# Altium PCB PCB1.PcbDoc
Units mil, origin at the board's own origin, x right, y up, seen from the top; angles counter-clockwise.
Board outline 2275 x 2745 mil, 2 copper layers (Top Layer, Bottom Layer); 38 components, 25 nets, 135 pads, 21 vias.
Unrouted connection lines stored in the file: 29.
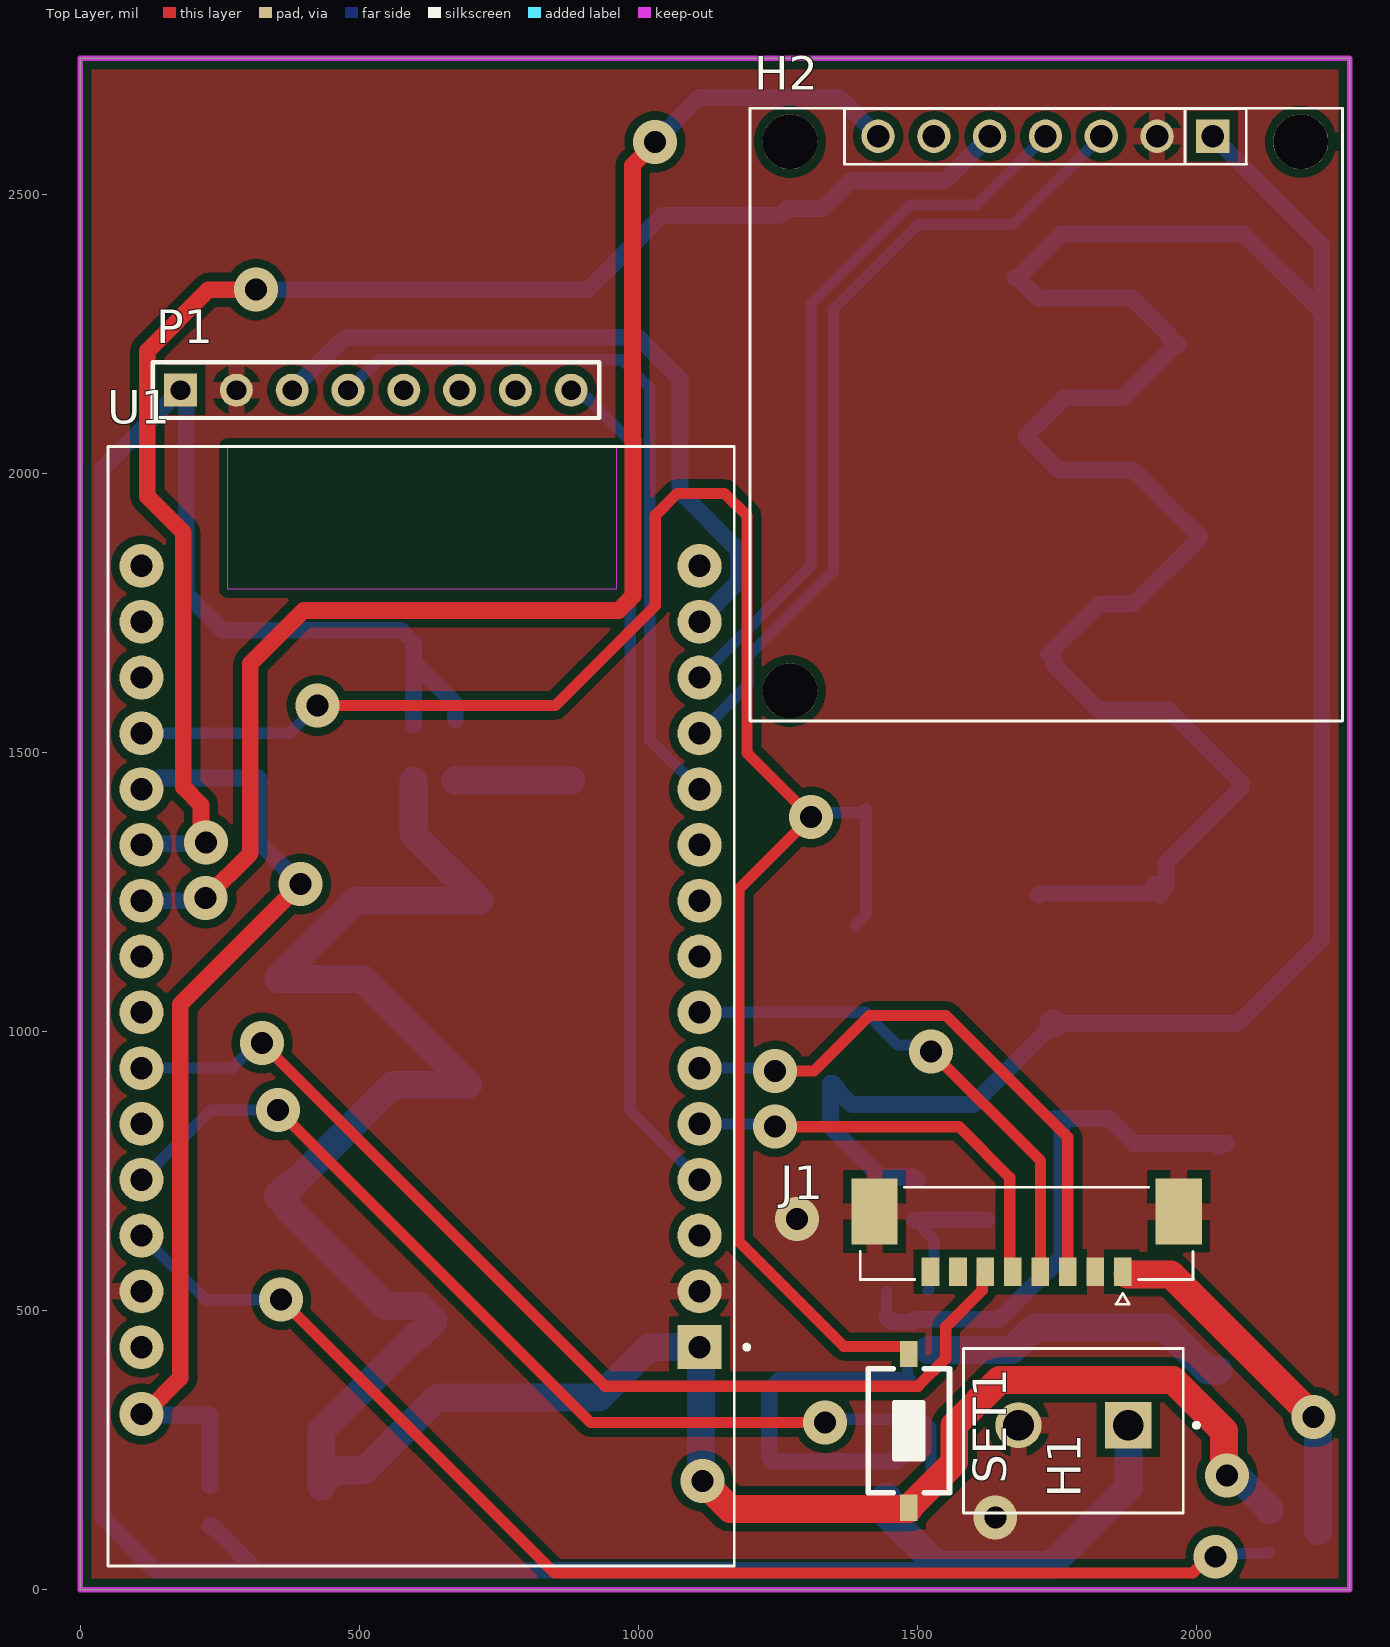
[diagram p0: Top Layer view]
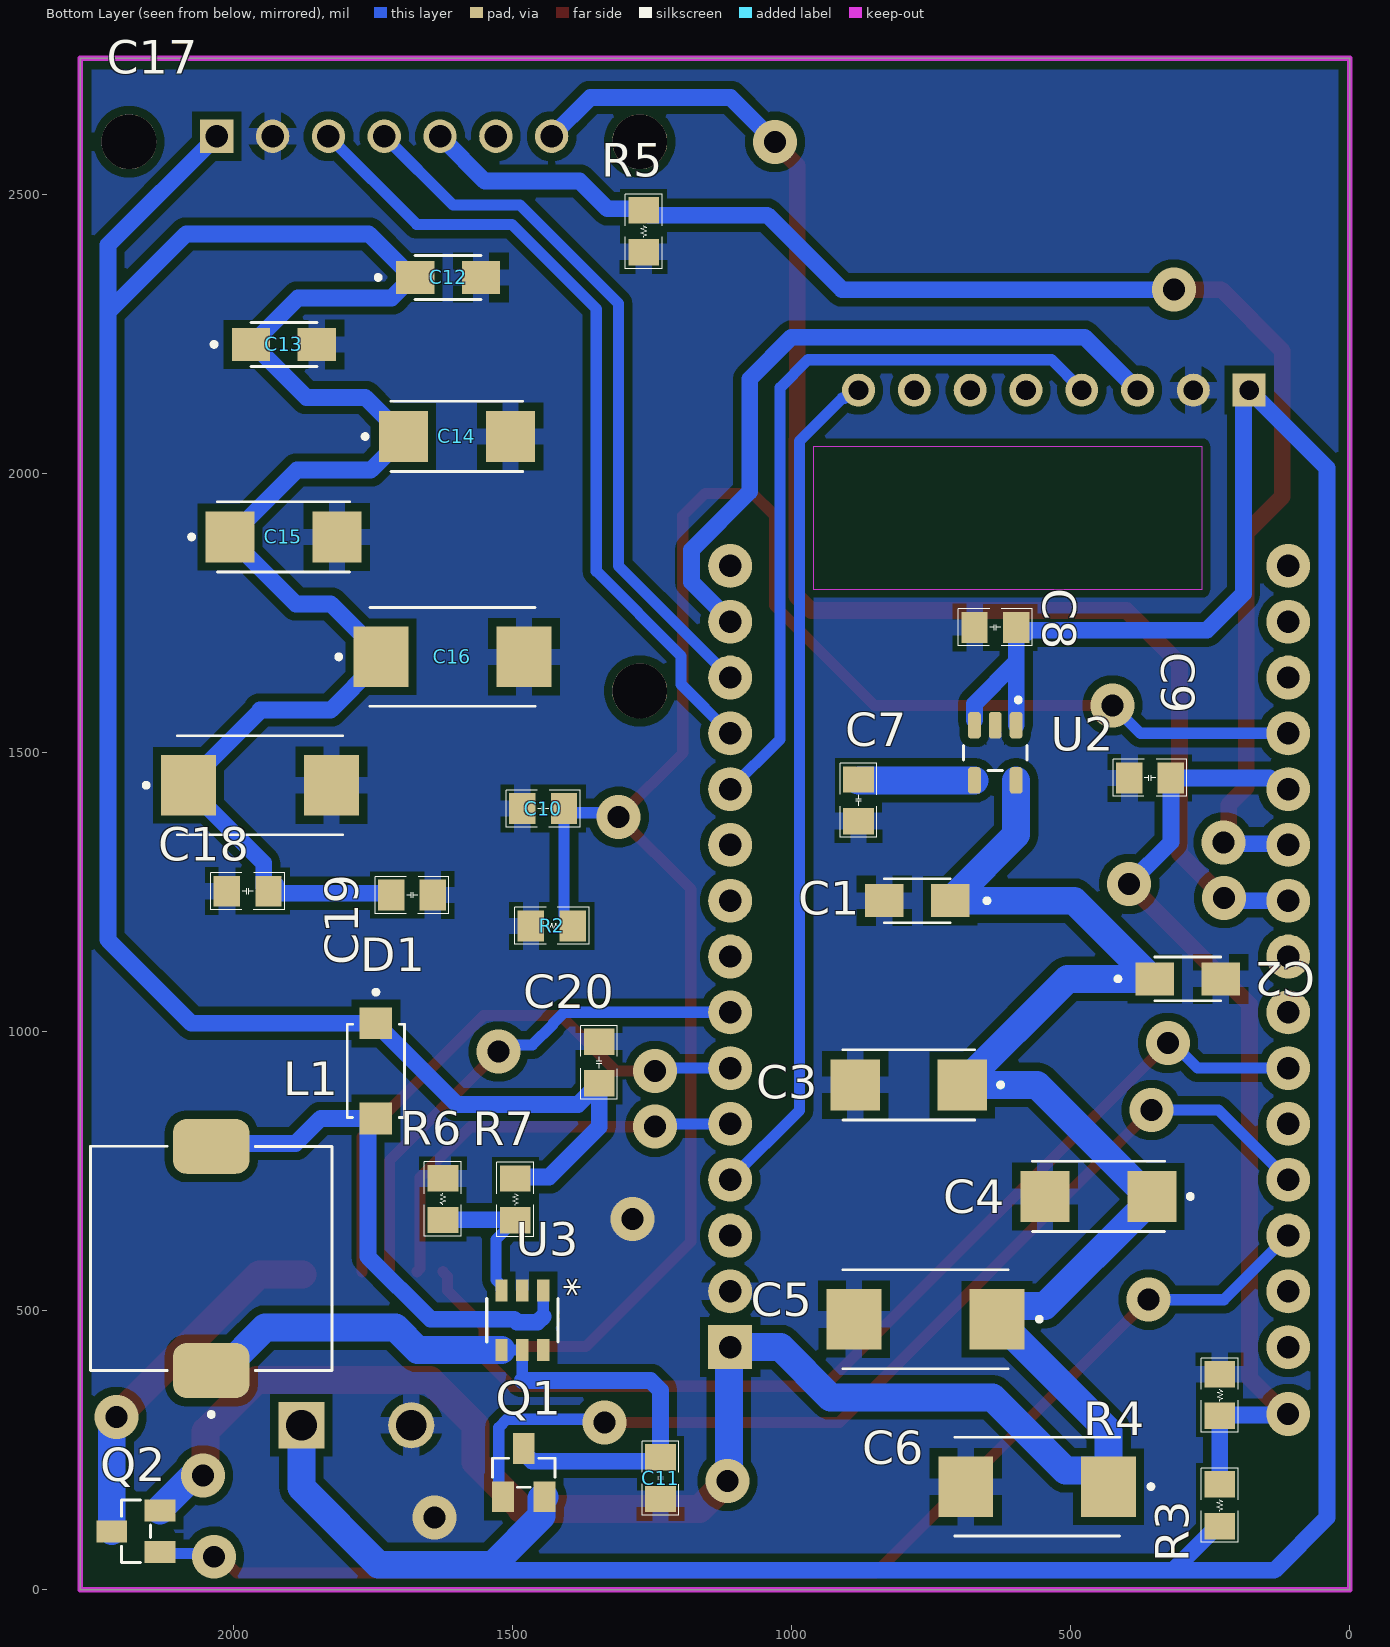
[diagram p1: Bottom Layer view, seen from below]
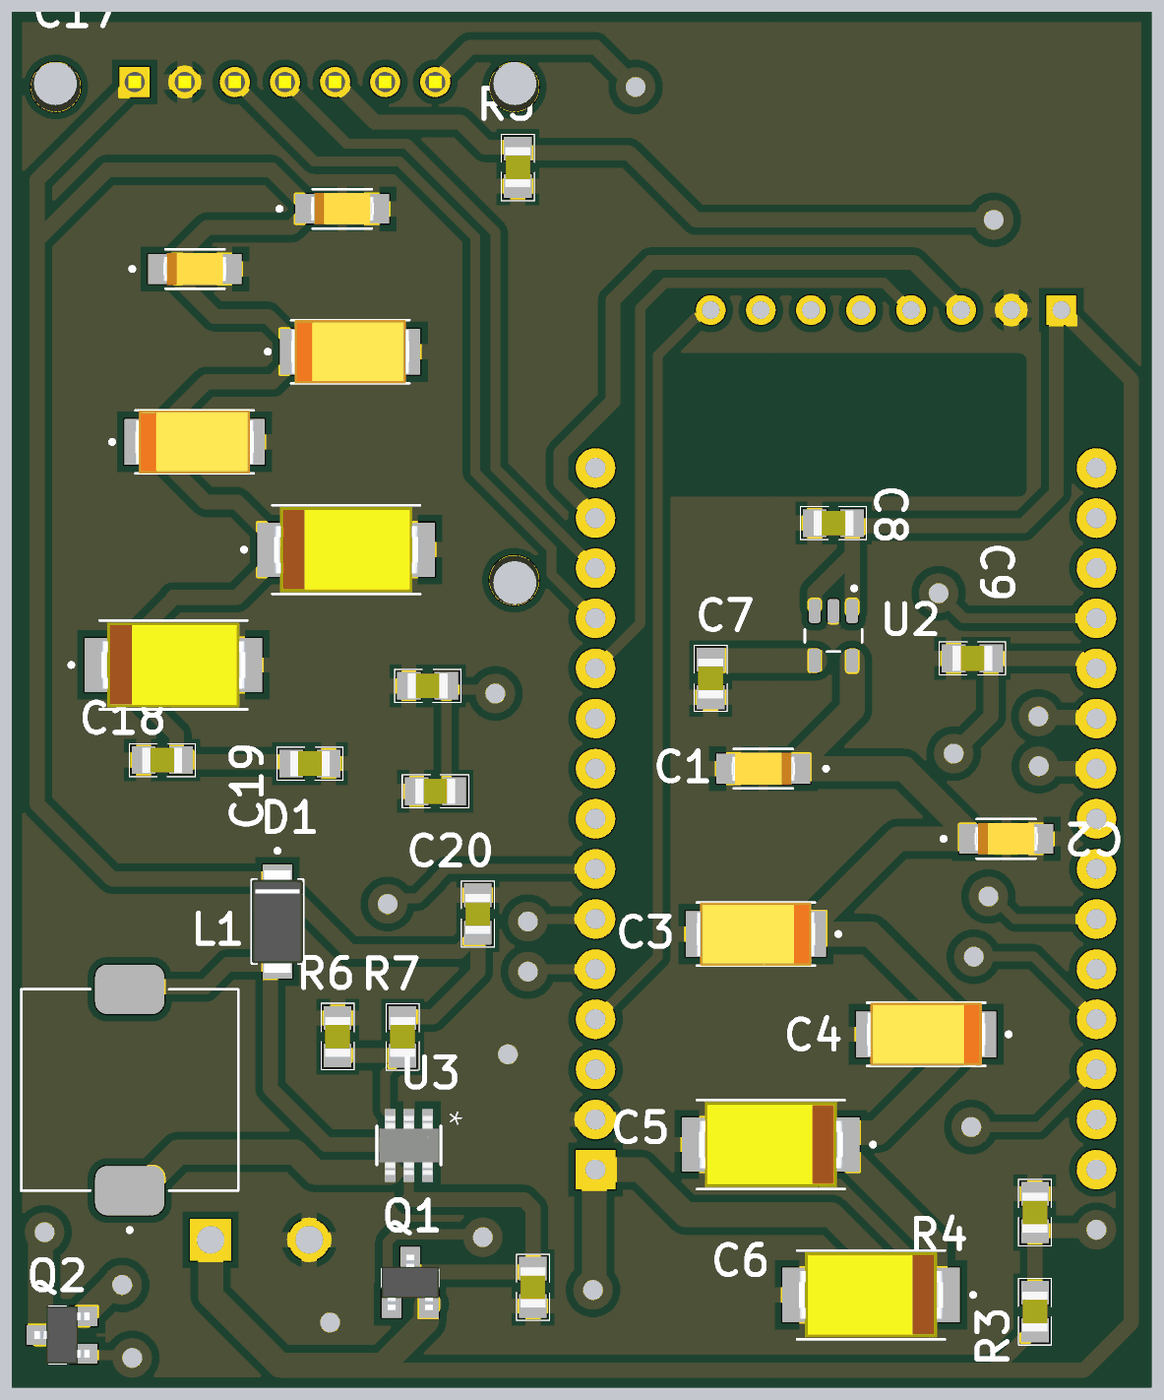
[diagram p2: 3D render of the assembled board from below, using the file's embedded part models]

## Layer stack, top to bottom
Top Solder: solder mask 0.4, Solder Resist, Dk 3.5
Top Layer: signal copper 1.4
Dielectric 1: dielectric 12.6, FR-4, Dk 4.8
Bottom Layer: signal copper 1.4
Bottom Solder: solder mask 0.4, Solder Resist, Dk 3.5

## Board outline
2275,0 1325,0 0,0 0,2745 2275,2745

## Design rules (kind name [scope] priority, off if disabled: settings)
BoardOutlineClearance [All] p1: gap=7.87 ignorepadtopadclearanceinfootprint=FALSE
Clearance [All] p1: gap=15 ignorepadtopadclearanceinfootprint=FALSE except(9.84: Arc-Hole Track-Hole SMDPad-Hole THPad-Hole Via-Hole Fill-Hole Poly-Hole Region-Hole Text-Hole)
ComponentClearance [All] p1: gap=5 collisioncheckmode=3 verticalgap=5 showdistances=TRUE
DiffPairsRouting [All] p1: maxlimit=10 minlimit=5 mostfreqgap=5 toplayer_minwidth=5 toplayer_maxwidth=1000 toplayer_prefwidth=5 bottomlayer_minwidth=5 bottomlayer_maxwidth=1000 bottomlayer_prefwidth=5 maxuncoupledlength=500
Height [All] p1: minheight=0 maxheight=71497.94 prefheight=500
HoleSize [All] p1: absolutevalues=TRUE maxlimit=248.03 minlimit=11.81 maxpercent=80.000 minpercent=20.000
HoleToHoleClearance [All] p1: gap=9.84 allowstackedmicrovias=FALSE
MinimumAnnularRing [All] p1: minimumring=3
MinimumSolderMaskSliver [All] p1: minsoldermaskwidth=0
PlaneClearance [All] p1: clearance=5
PlaneConnect PlaneConnectPowerPads [InPadClass('PowerPads')] p1: planeconnectstyle=Relief reliefexpansion=20 reliefentries=4 reliefconductorwidth=10 reliefairgap=10
PlaneConnect [All] p2: planeconnectstyle=Relief reliefexpansion=11.81 reliefentries=4 reliefconductorwidth=15 reliefairgap=5
PolygonConnect PolygonConnectPowerPads [All vs (InPadClass('PowerPads'))] p1: thpad.connectstyle=Direct thpad.reliefconductorwidth=10 thpad.reliefentries=4 thpad.polygonreliefangle="90 Angle" thpad.airgapwidth=10 smdpad.connectstyle=Direct smdpad.reliefconductorwidth=10 smdpad.reliefentries=4 smdpad.polygonreliefangle="90 Angle" smdpad.airgapwidth=10 via.connectstyle=Relief via.reliefconductorwidth=10 via.reliefentries=4 via.polygonreliefangle="90 Angle" via.airgapwidth=10
PolygonConnect [All] p2: thpad.connectstyle=Relief thpad.reliefconductorwidth=30 thpad.reliefentries=4 thpad.polygonreliefangle="90 Angle" thpad.airgapwidth=15 smdpad.connectstyle=Relief smdpad.reliefconductorwidth=30 smdpad.reliefentries=4 smdpad.polygonreliefangle="90 Angle" smdpad.airgapwidth=15 via.connectstyle=Direct via.reliefconductorwidth=30 via.reliefentries=4 via.polygonreliefangle="90 Angle" via.airgapwidth=15
RoutingVias [All] p1: holewidth=39.37 width=78.74 viastyle="Through Hole" minholewidth=39.37 minwidth=78.74 maxholewidth=39.37 maxwidth=78.74
SilkToSilkClearance [All] p1: silktosilkclearance=0
SilkToSolderMaskClearance [IsPad] p1: minsilkscreentomaskgap=1 clearancetoexposedcopper=TRUE
SolderMaskExpansion SolderMaskExpansion_Via [IsVia] p1: expansion=4 istentingtop=TRUE
SolderMaskExpansion [All] p2: expansion=2.95 istentingtop=FALSE
Width [All] p1: maxlimit=50 minlimit=20 preferedwidth=30
20 further rules are at their usual default settings.

## Components (designator, comment, footprint, x,y, rotation, side; value= is the part's Value field where it differs from the comment)
C1 "OPT" 1206_Tantalum 775,1235 r0 bottom
C2 "OPT" 1206_Tantalum 290,1095 r180 bottom
C3 "OPT" 2312_Tantalum 790,905 r0 bottom
C4 "OPT" 2312_Tantalum 450,705 r0 bottom
C5 "100uF" "2917 _Tantalum" 760,485 r0 bottom
C6 "100uF" "2917 _Tantalum" 560,185 r0 bottom
C7 "22uF" 0805_Cap 880,1415 r270 bottom
C8 "10uF" 0805_Cap 635,1725 r180 bottom
C9 "100nF" 0805_Cap 357.77,1455.13 r180 bottom
C10 "10uF" 0805_Cap 1445,1400 r0 bottom
C11 "22uF" 0805_Cap 1235,200 r90 bottom
C12 "OPT" 1206_Tantalum 1615.68,2351.95 r180 bottom
C13 "OPT" 1206_Tantalum 1909.74,2231.95 r180 bottom
C14 "OPT" 2312_Tantalum 1599.74,2066.95 r180 bottom
C15 "OPT" 2312_Tantalum 1910.61,1886.95 r180 bottom
C16 "100uF" "2917 _Tantalum" 1607.69,1671.95 r180 bottom
C17 "100uF" "2917 _Tantalum" 1952.69,1441.95 r180 bottom
C18 "100nF" 0805_Cap 1974.74,1251.95 r0 bottom
C19 "10uF" 0805_Cap 1680,1245 r0 bottom
C20 "22uF" 0805_Cap 1345,945 r90 bottom
D1 "SS34" SODFL5226X100N 1745,930 r270 bottom
H1 "KF301-2P" HANDSON_KF301-2P 1780,295 r180 top
H2 "A7680C" "Module A7680C" 2030,2605 r180 top
J1 "533980871" MOLEX_533980871 1696.18,638.9 r0 top
L1 "22uH" "INDUCTOR CDRH104" 2040,590 r90 bottom
P1 "MPU6050" HDR1X8 180,2150 r0 top
Q1 "S8550" SOT23 1480,210 r180 bottom
Q2 "S8550" SOT23 2175,105 r90 bottom
R2 "10K" 0805_Res 1430,1190 r180 bottom
R3 "8.2K" 0805_Res 232.72,151.88 r270 bottom
R4 "33K" 0805_Res 232.59,349.46 r270 bottom
R5 "10K" 0805_Res 1265,2435 r270 bottom
R6 "300" 0805_Res 1625,700 r90 bottom
R7 "2.2K" 0805_Res 1495,700 r270 bottom
SET1 "Button 2p" "Button 2p 3x6x2.5" 1485,285 r270 top
U1 "ESP32-DEVKIT-V1" MODULE_ESP32_DEVKIT_V1 610,1045.83 r180 top
U2 "SPX3819" SOT95P280X145-5N 635,1500 r270 bottom
U3 "MT3608" TSOT23-6SOT23-6_AER 1482.6,483.25 r270 bottom

## Footprints (in the part's own frame and the unit in brackets; to place one, negate y for a bottom-side part, rotate by r counter-clockwise, add the part's x,y. Pads: shape width x height; smd on the part's side, far side on the other; paste and mask are expansions set on the pad)
0805_Cap [mm]
  rect 1.2x1.4 smd: 1(-0.946,-0.003) 2(0.954,-0.003)
  silkscreen extent -1.68,-0.84 1.68,0.84, body extent -1.01,-0.64 1.01,0.63, height 0.61
0805_Res [mm]
  rect 1.2x1.4 smd: 1(-0.946,-0.003) 2(0.954,-0.003)
  silkscreen extent -1.68,-0.84 1.7,0.84, body extent -1.01,-0.64 1.01,0.63, height 0.61
1206_Tantalum [mm]
  rect 1.75x1.5 smd: 1(-1.5,0) 2(1.5,0)
  silkscreen extent -3.28,-1 1.5,1, body extent -1.6,-0.8 1.6,0.8, height 1.8
2312_Tantalum [mm]
  rect 2.24x2.32 smd: 1(-2.435,0) 2(2.435,0)
  silkscreen extent -4.28,-1.6 3,1.6, body extent -3,-1.6 3,1.6, height 2.8
"2917 _Tantalum" [mm]
  rect 2.5x2.75 smd: 1(-3.25,0) 2(3.25,0)
  silkscreen extent -5.28,-2.25 3.75,2.25, body extent -3.65,-2.15 3.65,2.15, height 3.1
"Button 2p 3x6x2.5" [mm]
  rect 1.2x0.8 smd: 1(-3.5,0) 2(3.5,0)
  silkscreen extent -2.82,-1.85 2.82,1.85, body extent -3.05,-1.85 3.05,1.85, height 2.5
HANDSON_KF301-2P [mm]
  rect 2.1x2.1 hole 1.4: 1(-2.5,0)
  round 2.1 hole 1.4: 2(2.5,0)
  silkscreen extent -5.7,-3.5 5,4
HDR1X8 [mm] "Connector; Header; 8 Position"
  rect 1.5x1.5 hole 0.9: 1(0,0)
  round 1.5 hole 0.9: 2(2.54,0) 3(5.08,0) 4(7.62,0) 5(10.16,0) 6(12.7,0) 7(15.24,0) 8(17.78,0)
  silkscreen extent -1.27,-1.27 19.05,1.27
"INDUCTOR CDRH104" [mm] "CDRH104 Cu?n C?m Dan SMD 1038-220 22uH 3.6A"
  rrect50% 2.5x3.5 smd: 1(-5,0) 2(5.2,0)
  silkscreen extent -7.1,-5.5 5.21,5.5
"Module A7680C" [mm] "Footprint for A7680C"
  rect 1.52x1.52 hole 1.02: 1(0,0)
  round 1.52 hole 1.02: 2(2.54,0) 3(5.08,0) 4(7.62,0) 5(10.16,0) 6(12.7,0) 7(15.24,0)
  round 2.5 hole 2.5: 21(-4,0.25) 21(19.25,25.25) 21(19.25,0.25)
  silkscreen extent -5.9,-1.28 21.07,26.62, body extent -5.88,-1.28 21.12,26.72, height 12.01
MODULE_ESP32_DEVKIT_V1 [mm]
  rect 2x2 / inner round 2 / far side rect 2x2 hole 1.02: 1(-12.7,15.515)
  round 2 hole 1.02: 2(-12.7,12.975) 3(-12.7,10.435) 4(-12.7,7.895) 5(-12.7,5.355) 6(-12.7,2.815) 7(-12.7,0.275) 8(-12.7,-2.265) 9(-12.7,-4.805) 10(-12.7,-7.345) 11(-12.7,-9.885) 12(-12.7,-12.425) 13(-12.7,-14.965) 14(-12.7,-17.505) 15(-12.7,-20.045) 16(12.7,-20.045) 17(12.7,-17.505) 18(12.7,-14.965) 19(12.7,-12.425) 20(12.7,-9.885) 21(12.7,-7.345) 22(12.7,-4.805) 23(12.7,-2.265) 24(12.7,0.275) 25(12.7,2.815) 26(12.7,5.355) 27(12.7,7.895) 28(12.7,10.435) 29(12.7,12.975) 30(12.7,15.515)
  Keep-Out Layer region: 8.78,-25.475 -8.91,-25.475 -8.91,-18.985 8.78,-18.985
  Keep-Out Layer region: 8.78,-25.475 -8.91,-25.475 -8.91,-18.985 8.78,-18.985
  silkscreen extent -14.95,-25.48 14.23,25.48
MOLEX_533980871 [mm]
  rect 0.8x1.3 smd mask+0.076: 1(4.375,-1.75) 2(3.125,-1.75) 3(1.875,-1.75) 4(0.625,-1.75) 5(-0.625,-1.75) 6(-1.875,-1.75) 7(-3.125,-1.75) 8(-4.375,-1.75)
  rect 2.1x3 smd mask+0.076: S1(-6.925,1) S2(6.925,1)
  silkscreen extent -7.57,-3.23 7.57,2.1
SODFL5226X100N [mm]
  rect 1.44x1.48 smd: 1(-2.165,0) 2(2.165,0)
  silkscreen extent -3.68,-1.3 2.12,1.3, body extent -2.6,-1.3 2.6,1.3, height 1
SOT23 [mm]
  rect 1x1.4 smd: 1(-0.95,-1.1) 2(0.95,-1.1) 3(0,1.1)
  silkscreen extent -1.42,-0.66 1.42,0.66, body extent -1.45,-1.4 1.45,1.4, height 1.25
SOT95P280X145-5N [mm]
  rrect50% 1.21x0.59 smd: 1(-1.255,0.95) 2(-1.255,0) 3(-1.255,-0.95) 4(1.255,-0.95) 5(1.255,0.95)
  silkscreen extent -2.51,-1.45 0.8,1.45
TSOT23-6SOT23-6_AER [mil]
  rect 39.5x22 smd paste+0 mask+0: 1(-53.25,37.4) 2(-53.25,0) 3(-53.25,-37.4) 4(53.25,-37.4) 5(53.25,0) 6(53.25,37.4)
  silkscreen extent -39,-64 39,64, body extent -59,-59 59,59, height 57

## Part data
C1 C2 C3 C4 C5 C6 C12 C13 C14 C15 C16 C17: library part Tantalum, "Molded Tantalum Capacitors"
C7 C8: library part "Ceramic Capacitor_1", Chung_Loai=Dán, Don_Vi=Con, Ma_Hang=MH004551, So_Chan=2, Ten_Linh_Kien="Tụ 0805 104-100nF 10% 50V"
C9 C10 C11 C18 C19 C20: library part "Ceramic Capacitor", Chung_Loai=Dán, Don_Vi=Con, Ma_Hang=MH004551, So_Chan=2, Ten_Linh_Kien="Tụ 0805 104-100nF 10% 50V"
D1: library part SS34ALH, "3A, 40V, Schottky Rectifier", Package="DO-221AC Taiwan Semiconductor", Availability="Not in stock", Check_prices=https://www.snapeda.com/parts/SS34ALH/Taiwan+Semiconductor/view-part/?ref=eda, MF="Taiwan Semiconductor", MP=SS34ALH, Price=None, SnapEDA_Link=https://www.snapeda.com/parts/SS34ALH/Taiwan+Semiconductor/view-part/?ref=snap
H1: "2 Pin Terminal Block 5mm Pitch", Package=None, Availability=Unavailable, MP=KF301-2P, Price=None
H2: library part "Module A7680C", "SIM Module A7680C; A7672S 4G"
J1: "MX 1.25mm 8 pin;Conn; Rect; Header; 1.25 mm Pitch; PCB; 8 Cir; Ver; SMT; PicoBlade; LF", Package=None, Availability=Unavailable, MP=533980871, Price=None
L1: library part Inductor, "Inductors from EPCOS include SMT Inductors, SMT Power Inductors, Transponder Coils, ISDN Transformers, xDSL Transformers, DC/DC Converters, RF Transformers and SMT Current Sense Transformers.", Package="NON STANDARD-2 EPCOS", Availability="In Stock", Check_prices=https://www.snapeda.com/parts/B82477G4472M000/EPCOS/view-part/?ref=eda, MF=EPCOS, MP=B82477G4472M000, Price=None, Purchase-URL=https://pricing.snapeda.com/search/part/B82477G4472M000/?ref=eda, SnapEDA_Link=https://www.snapeda.com/parts/B82477G4472M000/EPCOS/view-part/?ref=snap
P1: library part "Header 8", "Module MPU6050", LatestRevisionDate=17-Jul-2002, LatestRevisionNote="Re-released for DXP Platform.", Publisher="Altium Limited"
Q1 Q2: "Bipolar (BJT) Transistor PNP SOT-23", Package=None, Availability="In Stock", Check_prices=https://banlinhkien.com/s8050-sot23-trans-npn-0.5a-40v-j3y-10c-p15943539.html, MF=UMW, MP=S8050, Price=None, Purchase-URL=https://banlinhkien.com/s8050-sot23-trans-npn-0.5a-40v-j3y-10c-p15943539.html, SnapEDA_Link=https://www.snapeda.com/parts/S8050/Umwelt+Sensor+Teknik/view-part/?ref=snap
R2 R3 R4 R5 R6 R7: library part Resistor, Chung_Loai=Dán, Don_Vi=Con, Ma_Hang=MH005468, So_Chan=2, Ten_Linh_Kien="Trở 0805 1% 1k"
SET1: "Nut Nhan 2 Chan SMD 3x6x2.5", Ma_Hang=MH001036, Ten="Nút Nhấn 2 Chân 3x6x2.5MM SMD"
U1: "Dual core, Wi-Fi: 2.4 GHz up to 150 Mbits/s,BLE (Bluetooth Low Energy) and legacy Bluetooth, 32 bits, Up to 240 MHz", Package=None, Availability="Not in stock", Check_prices=https://www.snapeda.com/parts/ESP32-DEVKIT-V1/Do+it/view-part/?ref=eda, MF="Do it", MP=ESP32-DEVKIT-V1, Price=None, SnapEDA_Link=https://www.snapeda.com/parts/ESP32-DEVKIT-V1/Do+it/view-part/?ref=snap
U2: library part LP2985-33DBVR, "150-mA, 16-V, low-dropout voltage regulator with enable 5-SOT-23 -40 to 125", Package=None, Availability=Unavailable, MP=LP2985-33DBVR, Price=None
U3: "No Description Available", Mfr_Name=Aerosemi, RefDes=RefDes, Type=Type

## Via types
v1: diameter 78.74, hole 39.37, Top Layer to Bottom Layer, tented both sides, 21 vias

## Nets (pads, with @x,y where several pads share a name; then routed paths per layer and width w, separated by ;. In a path a pad name is that pad's centre, name@x,y a point inside that pad or via, vN(x,y) a via of type N, cw(c..) or ccw(c..) an arc to the next point about the centre after c; other vN are vias at no path point)
3V3: C1.1 C2.1 C3.1 C4.1 C5.1 C6.1 Q2.2 SET1.2 U1.1 U2.5 | length 4578.4
  Top Layer w50: v1(1115,195) 1165,145 SET1.2@1485,145 ; SET1.2 1566.44,228.65 1566.44,294.9 1647.88,376.34 1958.66,376.34 2050,285 2050,210 v1(2055,205)
  Bottom Layer w50: C6.1 C6.1@432.05,189.92 ; U2.5 597.6,1353.35 706.5,1244.45 706.5,1239.53 C1.1@711.02,1235 ; C5.1@632.2,484.84 C5.1 ; C1.1 C1.1@711.02,1235 ; 1070,435 1020,435 930,345 640,345 509.13,214.13 456.26,214.13 C6.1@432.05,189.92 ; U1.1 1112.5,432.5 1112.5,197.5 v1(1115,195) ; v1(2055,205) 2060.5,199.5 2077.35,199.5 2131.69,145.16 Q2.2 ; C6.1@432.05,189.92 432.05,285 602.91,455.87 607.83,455.87 632.05,480.08 C5.1 ; C5.1 608.36,508.68 546.32,508.68 373.23,681.77 373.23,685.91 C4.1 354.13,706.57 373.23,725.67 380.67,725.67 560,905 C3.1 695,905 695,905.71 505.71,1095 355,1095 355,1096.02 493.98,1235 C1.1@711.02,1235
5V: C12.1 C13.1 C14.1 C15.1 C16.1 C17.1 C18.1 C19.2 C20.1 D1.1 H2.1 R7.1 | length 5836.2
  Bottom Layer w30: R7.1@1500,735 1495,740 1434.43,740 1344.87,829.56 C20.1 1348.8,907.77 1357.43,899.15 1357.43,895.21 1382.64,870 1600,870 1730.87,1000.87 1730.87,1001.89 1743.98,1015 D1.1@1745,1015 ; C12.1 C12.1@1679.66,2351.95 ; C19.2@1729.81,1248.35 1726.2,1248.35 C19.2 1721.05,1248.61 1931.39,1248.61 C18.1@1935,1245 ; C16.1@1734.74,1676.95 1735.72,1676.95 1825.72,1766.95 1888.05,1766.95 2006.47,1885.38 2006.47,1888.53 1977.38,1917.62 1975.8,1917.62 1886.47,2006.95 1754.03,2006.95 1695.61,2065.38 C14.1 1694.74,2066.95 1694.74,2067.66 1764.03,2136.95 1869.74,2136.95 1949.35,2216.56 1949.35,2217.43 C13.1@1963.87,2231.95 ; C16.1@1744.74,1671.95 1744.74,1657.94 1825.72,1576.95 1952.61,1576.95 1952.61,1574.91 2079.74,1447.78 C17.1@2079.74,1441.95 ; D1.1 2075.24,1015.24 2225,1165 2225,2410 H2.1 ; C18.1@1924.95,1264.65 1928.89,1264.65 1937.51,1256.02 C18.1@1937.51,1254.72 ; C18.1@1934.74,1246.95 1946.13,1258.35 1946.13,1302.52 2080.65,1437.03 C17.1 C17.1@2080.65,1446.87 ; C18.1@1934.87,1252.09 C18.1@1937.51,1254.72 ; C18.1 C18.1@1937.51,1254.72 ; C13.1 C13.1@1963.87,2231.95 ; 2220,2295 2085,2430 1757.71,2430 C12.1@1679.66,2351.95 ; C12.1@1679.66,2351.95 1694.19,2337.43 1694.27,2337.43 1716.69,2315 1885,2315 1949.35,2250.65 1949.35,2246.48 C13.1@1963.87,2231.95
  Bottom Layer w50: D1.1@1744.21,1015.24 D1.1
GND: C1.2 C2.2 C3.2 C4.2 C5.2 C6.2 C7.2 C8.1 C9.1 C10.2 C11.1 C12.2 C13.2 C14.2 C15.2 C16.2 C17.2 C18.2 C19.1 C20.2 H1.2 H2.2 J1.2 J1.S1 J1.S2 P1.2 R2.1 R4.1 R5.2 R6.2 U1.2 U1.29 U2.2 U3.2
  other v1: 1640,130 1285,665
NetC7_1: C7.1 U2.4 | length 207.8
  Bottom Layer w50: U2.4 879.41,1450.59 C7.1@880,1450
NetC9_2: C9.2 R3.1 R4.2 U1.20 | length 1754
  Top Layer w30: v1(110,315) 115,315 179.37,379.37 179.37,1049.37 v1(395,1265)
  Bottom Layer w30: v1(110,315) 111.56,313.44 231.16,313.44 R4.2 ; U1.20 123.19,1435 143.19,1455 C9.2 ; R3.1@232.79,186.95 R4.2@232.79,311.82 ; C9.2@322.6,1448.66 320.2,1446.26 320.2,1339.8 v1(395,1265)
NetC10_1: C10.1 R2.2 SET1.1 U1.19 | length 3490.3
  Top Layer w20: v1(425,1585) 851.51,1585 1030.79,1764.27 1030.79,1925.79 1070,1965 1155,1965 1195,1925 1195,1500 v1(1310,1385) 1180.63,1255.63 1180.63,624.37 1368.58,436.42 1479.25,436.42 1485,430.67 SET1.1
  Bottom Layer w20: U1.19 375,1535 v1(425,1585) ; v1(1310,1385) 1317.57,1392.57 1407.43,1392.57 C10.1@1407.77,1392.23 ; R2.2@1390,1190 1390,1191.38 1407.77,1209.15 C10.1@1407.77,1392.23 ; C10.1 C10.1@1407.77,1392.23 ; C10.1@1410,1390 C10.1@1407.77,1392.23
NetC11_2: C11.2 L1.1 Q1.3 U3.4 U3.5 | length 1284.1
  Bottom Layer w20: 1482.6,375 U3.5 U3.4@1515,430
  Bottom Layer w30: C11.2 1241.81,230.63 1465.2,230.63 1480,245.43 Q1.3 ; C11.2@1234.87,246.2 1234.87,357.43 1252.44,375 1482.6,375
  Bottom Layer w50: U3.4 1670,430 1710,470 1943.46,470 2020.31,393.15 L1.1
NetD1_2: D1.2 L1.2 U3.1 | length 981.2
  Bottom Layer w20: 1445,490 U3.1@1445,535
  Bottom Layer w30: 1445,490 1455.25,479.75 1491.97,479.75 1497.22,485 1647.22,485 1759.13,596.92 D1.2@1759.13,830.63 ; D1.2 1759.13,844.76 1843.93,844.76 1888.69,800 L1.2@2055,800 ; L1.2 L1.2@2045,799.72
NetH2_3: H2.3 U1.12 | length 1468.1
  Bottom Layer w20: U1.12 1197.91,1622.91 1197.91,1673.42 1350,1825.5 1350,2295.5 1501.21,2446.72 1671.72,2446.72 H2.3
NetH2_4: H2.4 U1.13 | length 1297.1
  Bottom Layer w20: U1.13 1310,1835 1310,2305 1486.72,2481.72 1606.72,2481.72 H2.4
NetH2_5: H2.5 R5.1 U1.21 | length 2708.3
  Top Layer w30: v1(225.95,1339.05) 216.62,1348.38 216.62,1406.8 185,1438.42 185,1895 120.47,1959.53 120.47,2220.47 230,2330 v1(315,2330)
  Bottom Layer w30: U1.21 112.03,1337.03 223.92,1337.03 v1(225.95,1339.05) ; v1(315,2330) 910,2330 1043.61,2463.61 1256.51,2463.61 R5.1 ; R5.1@1265.13,2475 1330,2475 1380,2525 1550,2525 1625,2600 H2.5@1625,2605
NetH2_6: H2.6
NetH2_7: H2.7 U1.22 | length 2596.6
  Top Layer w30: v1(225,1240) 305,1320 305,1660 400,1755 964.95,1755 990.79,1780.84 990.79,2061.21 990,2061.99 990,2553.06 1030,2593.06 v1(1030,2595)
  Bottom Layer w30: U1.22 v1@220,1235 ; v1@1025,2595 v1(1030,2595) 1109.37,2674.37 1360.63,2674.37 H2.7
NetJ1_1: J1.1 Q2.3 | length 642.3
  Top Layer w50: J1.1@1876.84,565.28 1954.72,565.28 v1(2210,310)
  Bottom Layer w50: v1@2210,305 2218.31,296.69 Q2.3
NetJ1_3: J1.3 U1.6 | length 1012.6
  Top Layer w20: v1(1245,930) 1315,930 1414.37,1029.37 1551.66,1029.37 1770,811.03 J1.3
  Bottom Layer w20: U1.6 v1@1225,935
NetJ1_4: J1.4 U1.7 | length 917
  Top Layer w20: v1(1525,965) 1720.79,769.21 J1.4@1720.79,574.21
  Bottom Layer w20: U1.7 1407.98,1035 1427.87,1015.11 1427.87,1013.26 1464.88,976.24 1513.76,976.24 v1(1525,965)
NetJ1_5: J1.5 U1.5 | length 745
  Top Layer w20: v1(1245,830) 1575,830 1665.83,739.17 1665.83,575.75 J1.5
  Bottom Layer w20: U1.5 v1@1225,835
NetJ1_6: J1.6 U1.25 | length 1921.3
  Top Layer w20: v1(325.63,980) 940.63,365 1501.93,365 1551.26,414.33 1551.26,471.42 1616.61,536.77 1616.61,561.61 J1.6@1625,570
  Bottom Layer w20: U1.25 272.53,935 317.53,980 v1(325.63,980)
NetP1_3: P1.3 U1.14 | length 1270.3
  Bottom Layer w30: P1.3 475,2245 1000,2245 1075,2170 1075,1968.1 1179.37,1863.73 1179.37,1806.27 1115,1741.9 U1.14@1115,1735
NetP1_4: P1.4 U1.11 | length 1340.4
  Bottom Layer w20: P1.4 534.53,2204.53 970.47,2204.53 1020.79,2154.21 1020.79,1524.21 U1.11
NetP1_8: P1.8 U1.4 | length 1519
  Bottom Layer w20: P1.8 890.57,2150 905.2,2135.37 909.55,2135.37 985.79,2059.13 985.79,859.21 U1.4
NetQ1_1: Q1.1 U1.27 | length 1834.5
  Top Layer w20: v1(354.8,859.8) 914.6,300 v1(1335,300)
  Bottom Layer w20: U1.27 235,860 354.6,860 v1(354.8,859.8) ; v1(1335,300) 1340.87,305.87 1510.04,305.87 1524.69,291.22 1524.69,173.98 Q1.1
NetQ2_1: Q2.1 U1.28 | length 2287.9
  Top Layer w20: v1(360,520) 850,30 1993.91,30 2023.28,59.37 v1(2035,59.37)
  Bottom Layer w20: U1.28 225,520 v1(360,520) ; v1(2035,59.37) 2040.63,65 2129.09,65 Q2.1
NetR6_1: R6.1 R7.2 U3.3 | length 289
  Bottom Layer w20: R7.2 1499.07,662.43 1512.69,648.8 1512.69,644.87 1530,627.56 1530,555.25 1521,546.25 1521,537.5 U3.3
  Bottom Layer w30: R7.2 1508.16,662.43 R7.2@1520,662.43 ; R7.2@1507.69,663.1 1624.54,663.1 R6.1
VCC: C8.2 H1.1 P1.1 Q1.2 R3.2 U2.1 U2.3 | length 5476.9
  Bottom Layer w30: R3.2 236.79,114.31 316.1,35 ; C8.2@582.57,1712.43 575.13,1719.87 255.54,1719.87 190,1785.41 190,2140 P1.1 40.63,2010.63 40.63,129.37 135,35 316.1,35 ; C8.2@597.51,1697.51 597.51,1662.49 ; U2.1 597.51,1549.5 597.51,1662.49 ; U2.3@672.4,1558.23 672.4,1587.6 597.51,1662.49 ; 1535.28,35 316.1,35
  Bottom Layer w50: Q1.2 1445.35,166.69 1447.91,164.13 1447.91,132.37 1535.28,45 1740,45 1878.43,183.43 H1.1
pads on no net: H2.21 J1.7 J1.8 P1.5 P1.6 P1.7 U1.3 U1.8 U1.9 U1.10 U1.15 U1.16 U1.17 U1.18 U1.23 U1.24 U1.26 U1.30 U3.6

## Polygon pours and split planes (outlines as drawn)
GND on Bottom Layer "GND_L02_P000" (solid, remove dead copper, pour order 0): 0,0 0,2745 2275,2745 2275,0
GND on Top Layer "GND_L01_P001" (solid, remove dead copper, pour order 1): 0,0 -5,5 -5,2745 2275,2745 2275,0

## Keep-outs
Keep-Out Layer:
  lines w10: 0,0 0,2745 2275,2745 2275,0 0,0

## Text inside footprints (layer, text, board x,y; h text height)
U3: Bottom Overlay "*" at 1428.2,559 h50 r90; Mechanical 13 "*" at 1476.6,514.25 h50 r90